# Altium PCB 智能车主板.PcbDoc
Units mil, origin at the board's own origin, x right, y up, seen from the top; angles counter-clockwise.
Board outline 3115 x 1870 mil, 4 copper layers (Top, GND02, PWR03, BOTTOM), stack 23.756 mil thick; 92 components, 73 nets, 361 pads, 0 vias.
Unrouted connection lines stored in the file: 221.
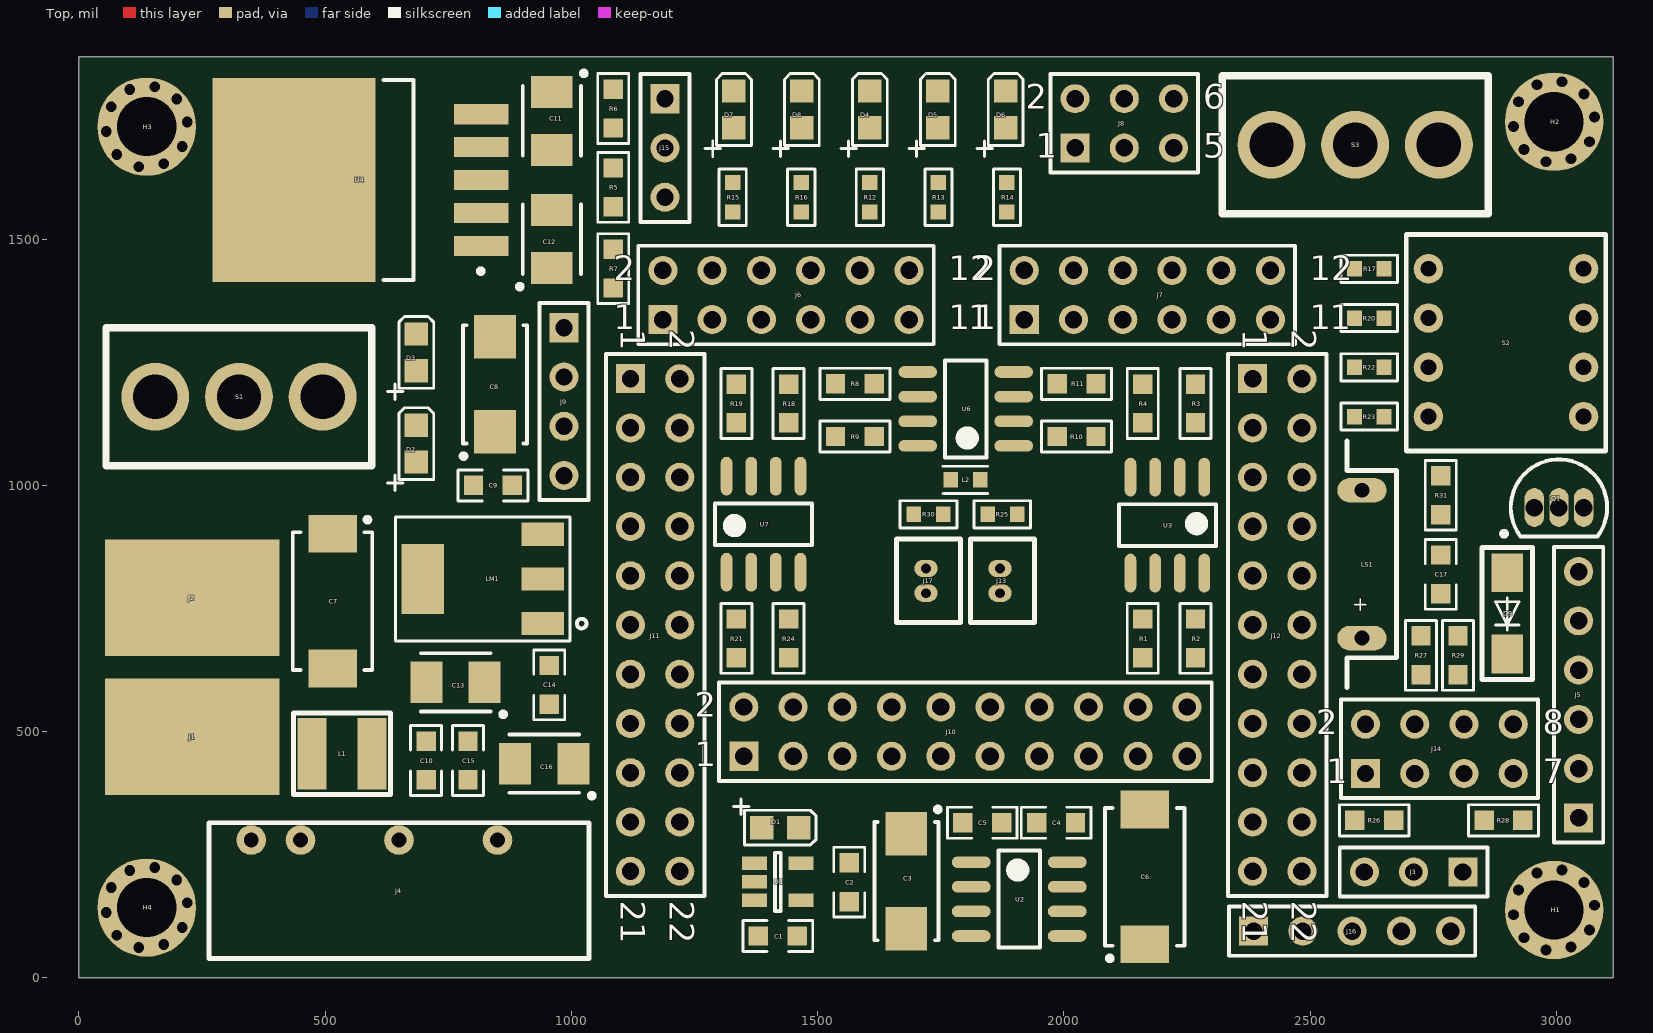
[diagram p0: Top view]
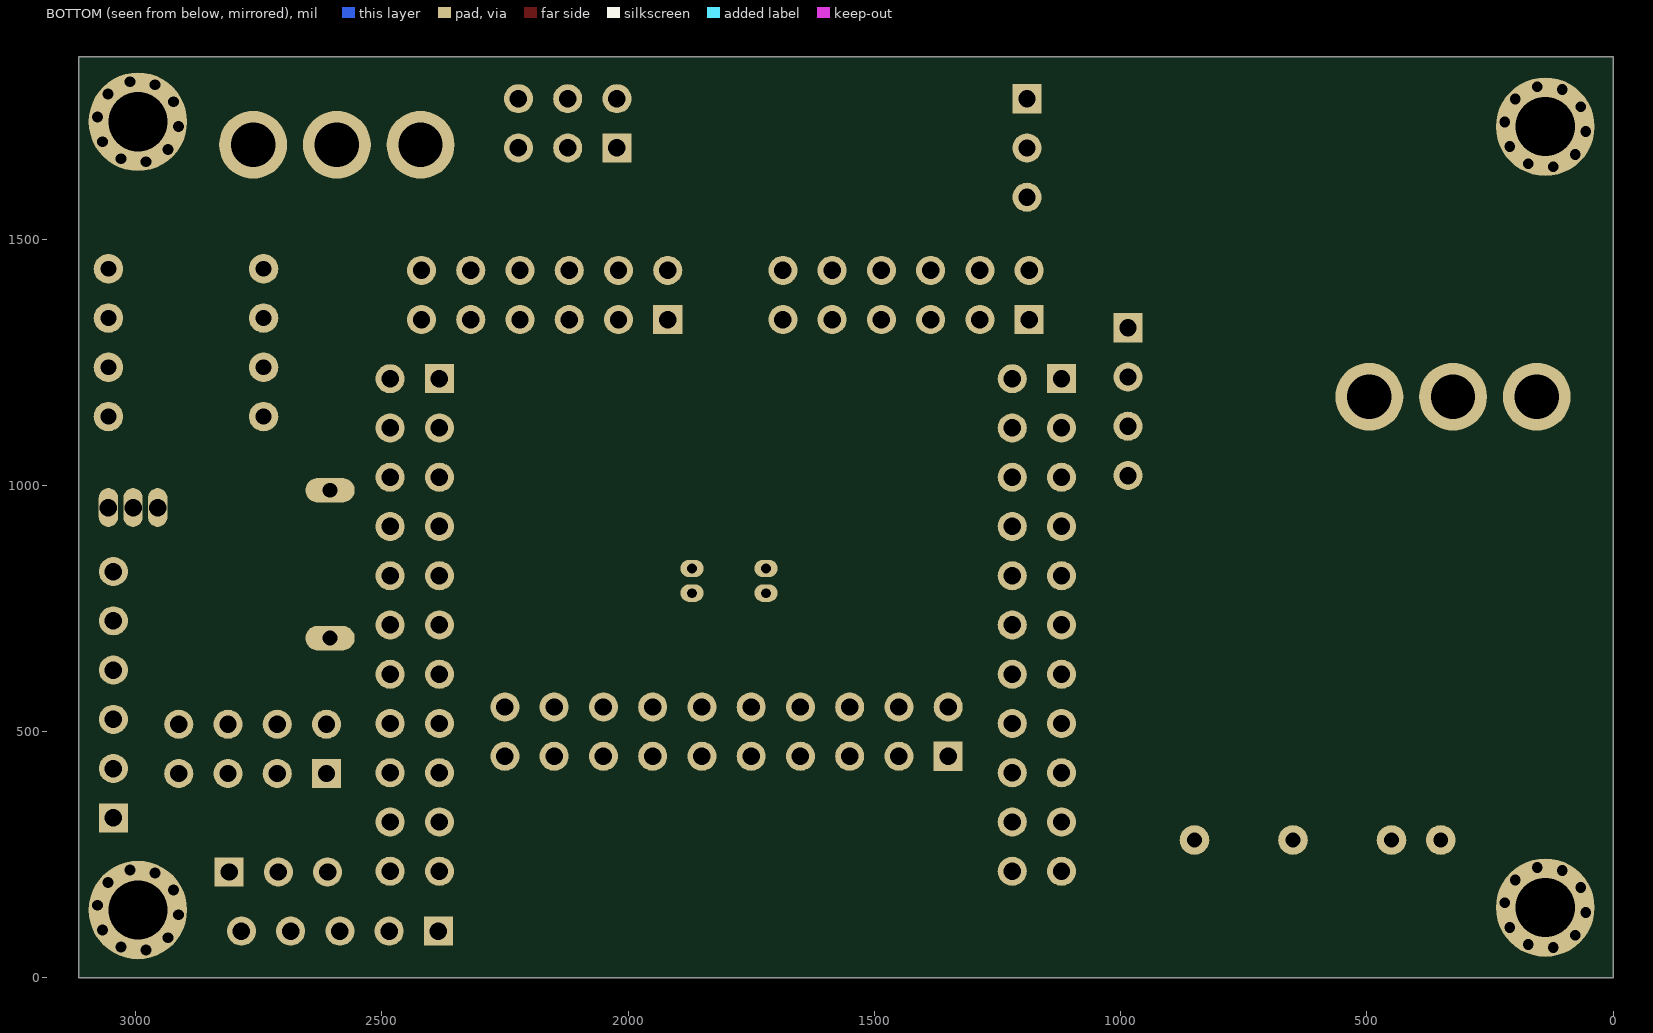
[diagram p1: BOTTOM view, seen from below]
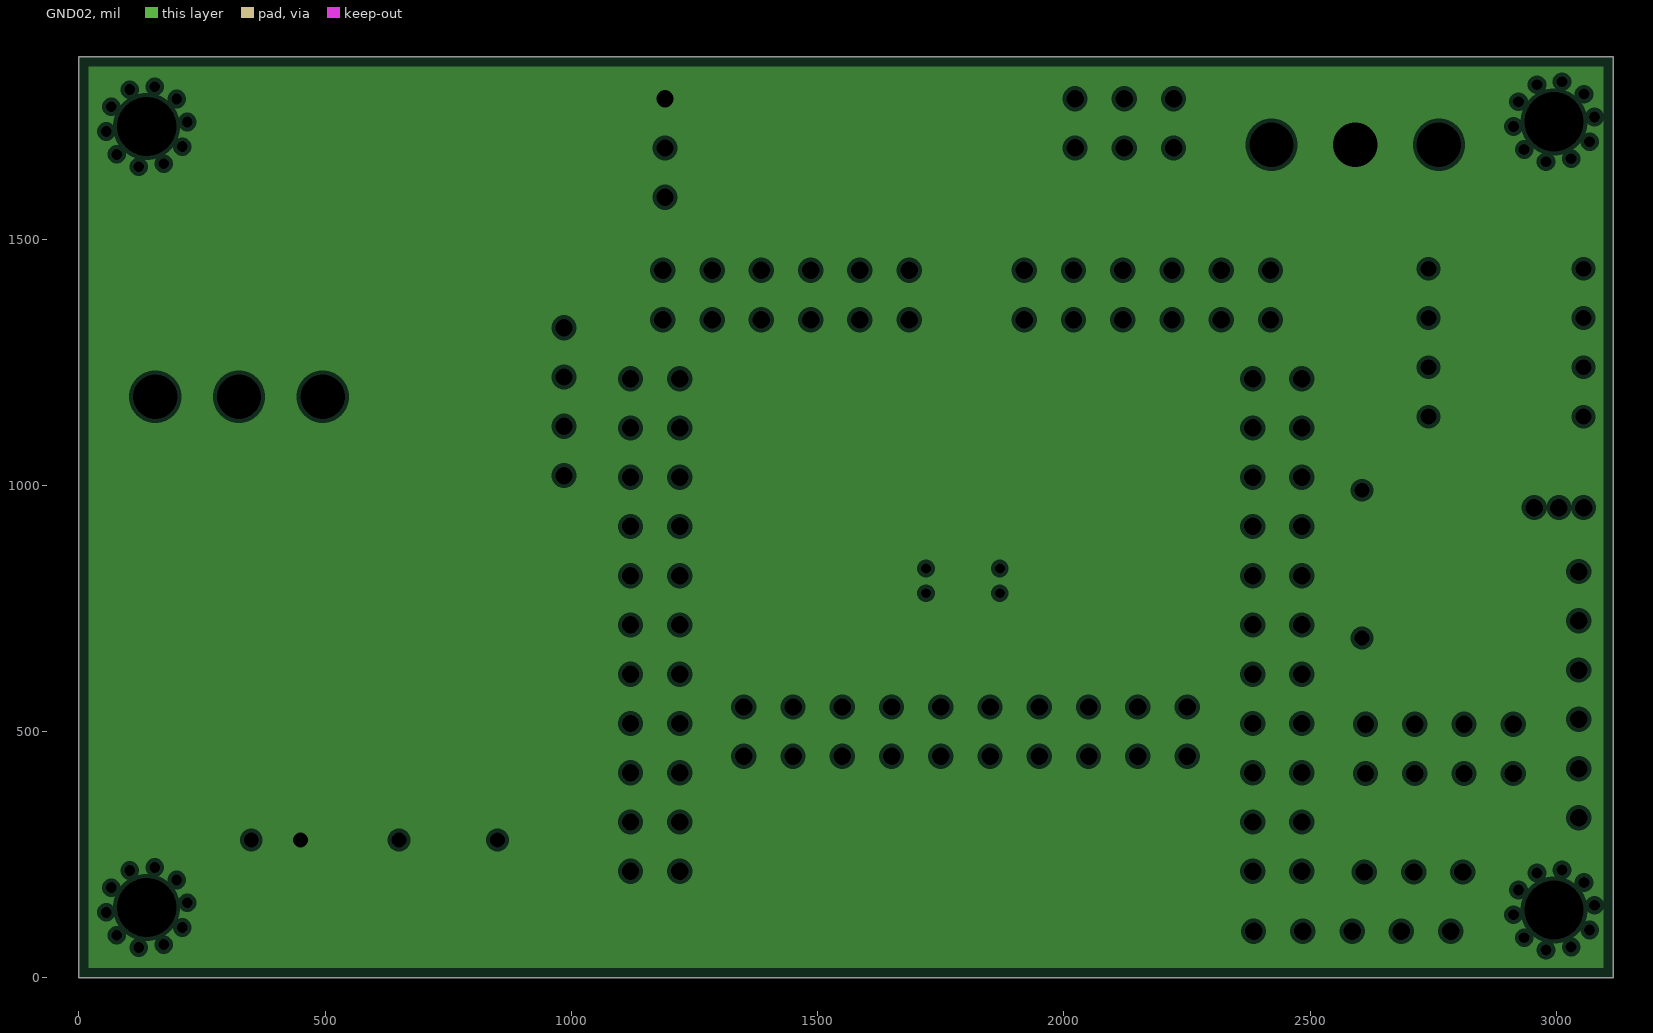
[diagram p2: GND02, clearances drawn from the general rule]
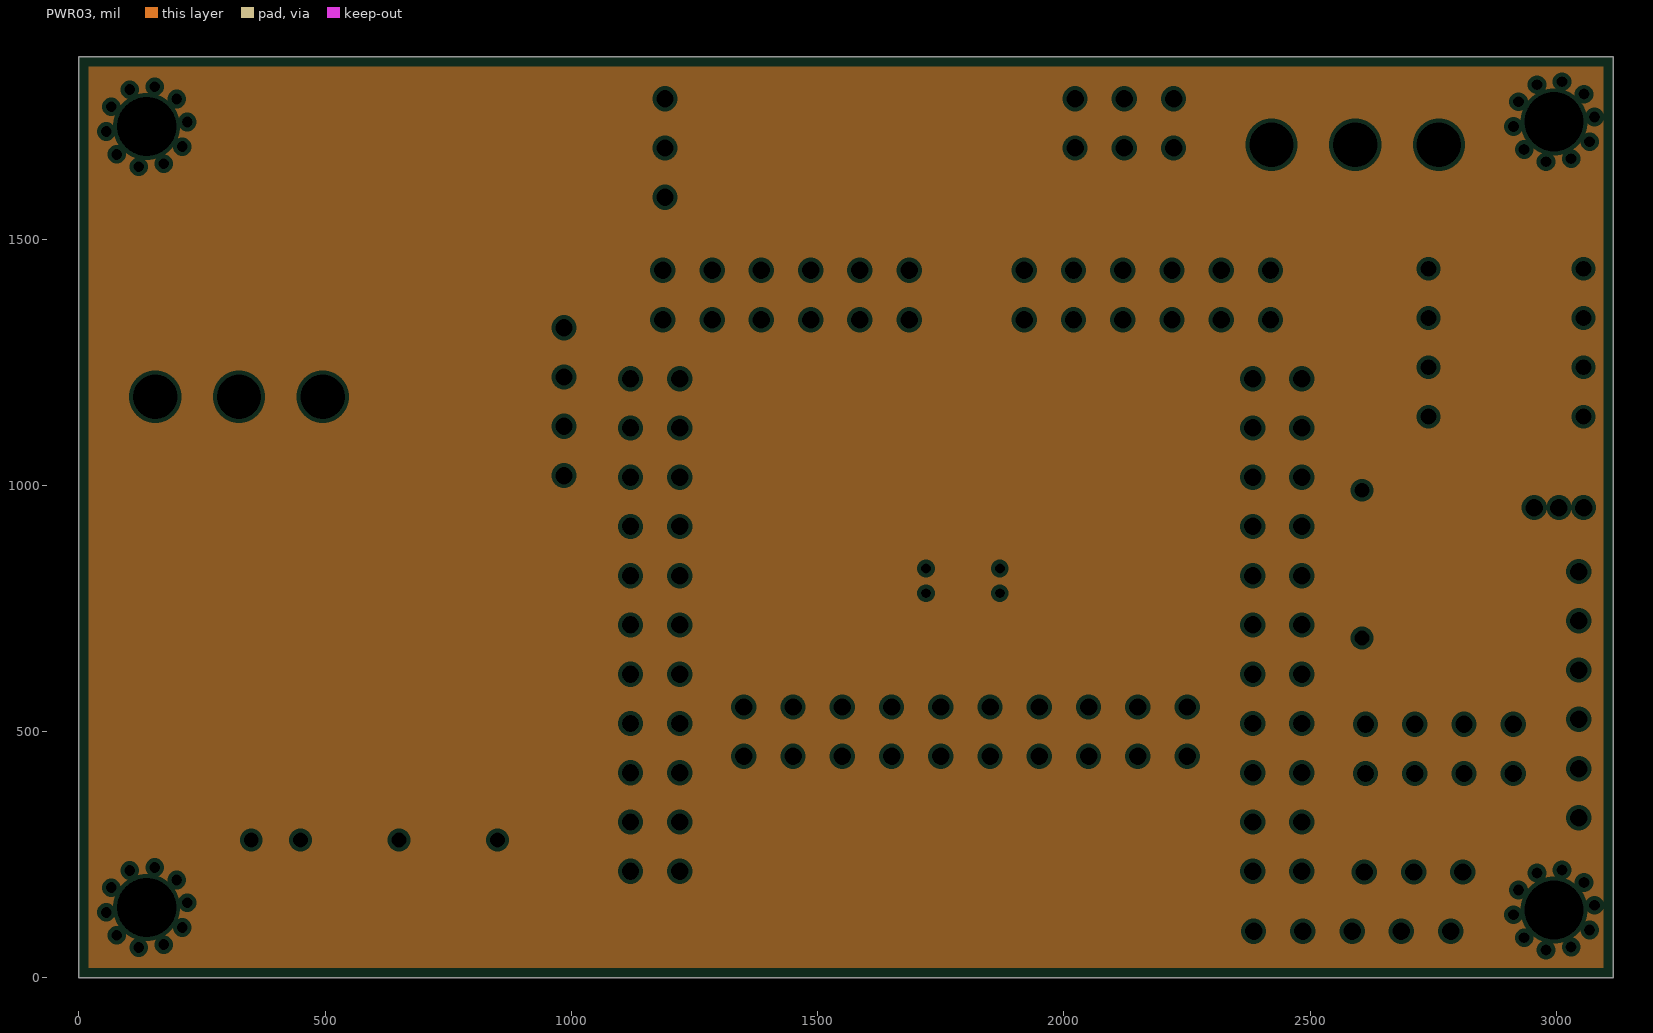
[diagram p3: PWR03, clearances drawn from the general rule]

## Layer stack, top to bottom
Top Solder: solder mask 0.4, Solder Resist, Dk 3.5
Top: signal copper 1.4
Dielectric 1: prepreg 2.8, PP-006, Dk 4.1
GND02: plane copper 1.3779, net (Multiple Nets)
Dielectric1: dielectric 12.6, FR-4, Dk 4.8
PWR03: plane copper 1.3779, net (Multiple Nets)
Dielectric 2: prepreg 2.8, PP-006, Dk 4.1
BOTTOM: signal copper 1.4
Bottom Solder: solder mask 0.4, Solder Resist, Dk 3.5

## Board outline
0,0 3115,0 3115,1870 0,1870

## Design rules (kind name [scope] priority, off if disabled: settings)
Clearance [All] p1: gap=6 ignorepadtopadclearanceinfootprint=FALSE except(8: Arc-Arc Arc-Track Track-Track; 10: Arc-Fill Arc-Poly Arc-Region Track-Fill Track-Poly Track-Region SMDPad-Fill SMDPad-Poly SMDPad-Region THPad-Fill THPad-Poly THPad-Region Fill-Fill Fill-Poly Fill-Region Poly-Poly Poly-Region Region-Region)
PlaneClearance [All] p1: clearance=8
PlaneConnect [All] p1: planeconnectstyle=Direct reliefexpansion=20 reliefentries=4 reliefconductorwidth=10 reliefairgap=10
PolygonConnect [All] p1: connectstyle=Direct reliefconductorwidth=10 reliefentries=4 polygonreliefangle="90 Angle" airgapwidth=10
RoutingVias [All] p1: holewidth=12 width=22 viastyle="Through Hole" minholewidth=12 minwidth=22 maxholewidth=12 maxwidth=22
SilkToSilkClearance [All] p1: silktosilkclearance=2
SilkToSolderMaskClearance [IsPad] p1: minsilkscreentomaskgap=2 clearancetoexposedcopper=TRUE
SolderMaskExpansion [All] p1: expansion=4 istentingtop=FALSE
Width PWR [InNetClass('PWR')] p1: maxlimit=60 minlimit=15 preferedwidth=15
Width [All] p2: maxlimit=6 minlimit=6 preferedwidth=6
26 further rules are at their usual default settings.

## Components (designator, comment, footprint, x,y, rotation, side; value= is the part's Value field where it differs from the comment)
C1 "4.7uF" 0805C 1419.09,85 r0 top
C2 "4.7uF" 0805C 1564.09,194.37 r90 top
C3 "47uF" C型钽电容_6032_28 1680,196.46 r270 top
C4 "10uF" 0805C 1984.09,315 r0 top
C5 "0.1uF" 0805C 1834.09,315 r0 top
C6 "100uF" D型钽电容_7343_31 2164.09,205 r90 top
C7 "47uF" D型钽电容_7343_31 515,765 r270 top
C8 "22uf" C型钽电容_6032_28 845,1205 r90 top
C9 "0.1uF" 0805C 840.63,1000 r0 top
C10 "4.7uF" 0805C 705,441.39 r90 top
C11 "22uF" B型钽电容_3528_21 960.32,1740 r270 top
C12 "22uF" B型钽电容_3528_21 960.32,1500 r90 top
C13 "22uf" B型钽电容_3528_21 765,600 r180 top
C14 "0.1uF" 0805C 955,595 r90 top
C15 "0.1uF" 0805C 790,441.39 r90 top
C16 "22uF" B型钽电容_3528_21 945,435 r180 top
C17 "104" 0805C 2765,819.37 r90 top
D1 "1N5819" 0805D 1424.09,305 r0 top
D2 "SS34" 0805D 685,1084.68 r90 top
D3 "1N5819" 0805D 685,1270 r90 top
D4 "LED" 0805D 1605.83,1763.23 r90 top
D5 "LED" 0805D 1743.82,1763.23 r90 top
D6 "LED" 0805D 1881.81,1763.23 r90 top
D7 "LED" 0805D 1329.84,1763.23 r90 top
D8 "LED" 0805D 1467.83,1763.23 r90 top
D9 "SS34" SS34_3D 2900,740.08 r270 top
H1 "固定孔" 铜柱孔3 2995.12,137.8 r0 top
H2 "固定孔" 铜柱孔3 2995.12,1738.23 r0 top
H3 "固定孔" 铜柱孔3 137.8,1728.23 r0 top
H4 "固定孔" 铜柱孔3 137.8,142.8 r0 top
J1 "-" 单面焊盘2*3MM_1PIN 230,489.68 r90 top
J2 "-" 单面焊盘2*3MM_1PIN 230,771.85 r270 top
J3 "AD-KEY" HDR1X3 2810,215 r180 top
J4 "CON4" B0505S-2W 600,280 r0 top
J5 "OLED" HDR1X6 3045,325 r90 top
J6 "CON12" HDR2X6 1185.63,1336.57 r0 top
J7 "CON12" HDR2X6 1919.37,1336.57 r0 top
J8 "motor drive" HDR2X3 2022.52,1685.08 r0 top
J9 "bluetooth" HDR1X4 985,1320 r270 top
J10 "HEADER 10X2" HDR2X10 1350,450 r0 top
J11 "HEADER 11X2" HDR2X11 1120,1216.57 r270 top
J12 "HEADER 11X2" HDR2X11 2382.99,1216.57 r270 top
J13 "CON2" 2PIN杜邦插座_1.27MM 1870,781.26 r90 top
J14 "BM" HDR2X4 2612.24,415 r0 top
J15 "servo drive" HDR1X3 1190,1785 r270 top
J16 "CCD" HDR1X5 2385,95 r0 top
J17 "CON2" 2PIN杜邦插座_1.27MM 1720,781.26 r90 top
L1 "6.8uH" CDRH3D16_4.2*1.8 533.98,455.25 r90 top
L2 "100M" 0603L 1800,1011.26 r0 top
LM1 "lm2940" SOT-223 820,810 r90 top
LS1 "Bell" 蜂鸣器侧装 2605,890 r90 top
Q1 "2N3904" TO-92A 3005,955 r270 top
R1 "1K" 0805R 2160,689.37 r270 top
R2 "1K" 0805R 2267,689.37 r270 top
R3 "1K" 0805R 2267,1166.26 r90 top
R4 "1K" 0805R 2160,1166.26 r90 top
R5 "3.9k" 0805R 1085,1605 r90 top
R6 "1k" 0805R 1085,1765 r90 top
R7 "1k" 0805R 1085,1440 r90 top
R8 "1K" 0805R 1575.63,1206.26 r180 top
R9 "1K" 0805R 1575.63,1099.26 r180 top
R10 "1K" 0805R 2025.63,1099.26 r180 top
R11 "1K" 0805R 2025.63,1206.26 r0 top
R12 "1k" 0603R 1605.85,1585 r270 top
R13 "2.2k" 0603R 1745.09,1585 r270 top
R14 "3.3k" 0603R 1884.33,1585 r270 top
R15 "3.3K" 0603R 1327.36,1585 r270 top
R16 "3.3K" 0603R 1466.6,1585 r90 top
R17 "1k" 0603R 2620,1439.68 r180 top
R18 "1K" 0805R 1441,1166.26 r90 top
R19 "1K" 0805R 1335,1166.26 r90 top
R20 "1k" 0603R 2620,1339.68 r180 top
R21 "1K" 0805R 1335,689.37 r270 top
R22 "1k" 0603R 2620,1239.68 r180 top
R23 "1k" 0603R 2620,1139.68 r180 top
R24 "1K" 0805R 1441,689.37 r90 top
R25 "1k" 0603R 1875,941.26 r180 top
R26 "1k" 0805R 2630,320 r180 top
R27 "1k" 0805R 2725,655 r90 top
R28 "1k" 0805R 2892.36,320 r180 top
R29 "1k" 0805R 2800,655 r90 top
R30 "1k" 0603R 1725,941.26 r180 top
R31 "1K" 0805R 2765,980 r90 top
S1 "SW-SPST" 开关 480,925 r270 top
S2 "SW DIP-4" 4路拨码开关 2755,1384.68 r0 top
S3 "SW-SPST" 开关 2746.24,1436.52 r270 top
U1 "TPS73633" SOT23_5-LEADS 1419.09,195 r0 top
U2 "LM2663" SOP_8(OPA) 1909.09,160 r0 top
U3 "HCPL0631" SOP_8(OPA) 2210,919.37 r270 top
U4 "MIC29302" TO_263_5(10.5*8.4MM) 594.61,1623.94 r0 top
U6 "HCPL0631" SOP_8(OPA) 1800.63,1155.26 r180 top
U7 "HCPL0631" SOP_8(OPA) 1390,921.26 r90 top

## Footprints (in the part's own frame and the unit in brackets; to place one, negate y for a bottom-side part, rotate by r counter-clockwise, add the part's x,y. Pads: shape width x height; smd on the part's side, far side on the other; paste and mask are expansions set on the pad)
2PIN杜邦插座_1.27MM [mm]
  oval 0.9x1.2 hole 0.5: 1(0,0) 2(1.27,0)
  silkscreen extent -1.52,-1.78 2.79,1.52
4路拨码开关 [mil]
  round 60 hole 32.01: 1(-15,55) 2(-15,-45) 3(-15,-145) 4(-15,-245) 5(299.96,-245) 6(299.96,-145) 7(299.96,-45) 8(299.96,55)
  silkscreen extent -60,-315 345,125
0603L [mm]
  rect 0.76x0.8 smd: 1(-0.76,0) 2(0.76,0)
  silkscreen extent -1.15,-0.7 1.15,0.7
0603R [mm]
  rect 0.76x0.8 smd: 1(-0.76,0) 2(0.76,0)
  silkscreen extent -1.46,-0.7 1.46,0.7
0805C [mm]
  rect 1x1 smd: 1(-1,0) 2(1,0)
  silkscreen extent -1.8,-0.8 1.8,0.8
0805D [mm]
  rect 1.2x1.2 smd: 1(-0.95,0) 2(0.95,0)
  silkscreen extent -2.42,-0.9 1.85,1.49
0805R [mm]
  rect 1x1 smd: 1(-1,0) 2(1,0)
  silkscreen extent -1.8,-0.8 1.8,0.8
B0505S-2W [mil]
  round 60 hole 30: 1(-250,0) 2(-150,0) 3(50,0) 4(250,0)
  silkscreen extent -336,-241 436,35
B型钽电容_3528_21 [mm] "Molded Capacitor, 2-Leads, Body 3.5x2.8mm, IPC Medium Density"
  rect 1.65x2.15 smd: 1(-1.5,0) 2(1.5,0)
  silkscreen extent -2.57,-1.5 1.8,1.78, body extent -1.8,-1.45 1.8,1.45, height 1.9
CDRH3D16_4.2*1.8 [mm]
  rect 3.7x1.5 smd: 1(0,-1.55) 2(0,1.55)
  silkscreen extent -2.1,-2.5 2.1,2.5
C型钽电容_6032_28 [mm] "Molded Capacitor, 2-Leads, Body 6.0x3.2mm, IPC Medium Density"
  rect 2.25x2.15 smd: 1(-2.45,0) 2(2.45,0)
  silkscreen extent -3.82,-1.65 3.05,1.75, body extent -3,-1.6 3,1.6, height 2.5
D型钽电容_7343_31 [mm] "Molded Capacitor, 2-Leads, Body 7.3x4.3mm, IPC Medium Density"
  rect 1.95x2.5 smd: 1(-3.475,0) 2(3.475,0)
  silkscreen extent -4.32,-2.05 3.55,2.05, body extent -3.65,-2.15 3.65,2.15, height 2.8
HDR1X3 [mm] "Connector; Header; 3 Position"
  rect 1.5x1.5 hole 0.9: 1(0,0)
  round 1.5 hole 0.9: 2(2.54,0) 3(5.08,0)
  silkscreen extent -1.27,-1.27 6.35,1.27
HDR1X4 [mm] "Connector; Header; 4 Position"
  rect 1.5x1.5 hole 0.9: 1(0,0)
  round 1.5 hole 0.9: 2(2.54,0) 3(5.08,0) 4(7.62,0)
  silkscreen extent -1.27,-1.27 8.89,1.27
HDR1X5 [mm] "Connector; Header; 5 Position"
  rect 1.5x1.5 hole 0.9: 1(0,0)
  round 1.5 hole 0.9: 2(2.54,0) 3(5.08,0) 4(7.62,0) 5(10.16,0)
  silkscreen extent -1.27,-1.27 11.43,1.27
HDR1X6 [mm] "Connector; Header; 6 Position"
  rect 1.5x1.5 hole 0.9: 1(0,0)
  round 1.5 hole 0.9: 2(2.54,0) 3(5.08,0) 4(7.62,0) 5(10.16,0) 6(12.7,0)
  silkscreen extent -1.27,-1.27 13.97,1.27
HDR2X3 [mm] "Connector; Header; 3x2 Position"
  rect 1.5x1.5 hole 0.9: 1(0,0)
  round 1.5 hole 0.9: 2(0,2.54) 3(2.54,0) 4(2.54,2.54) 5(5.08,0) 6(5.08,2.54)
  silkscreen extent -1.27,-1.27 6.35,3.81
HDR2X4 [mm] "Connector; Header; 4x2 Position"
  rect 1.5x1.5 hole 0.9: 1(0,0)
  round 1.5 hole 0.9: 2(0,2.54) 3(2.54,0) 4(2.54,2.54) 5(5.08,0) 6(5.08,2.54) 7(7.62,0) 8(7.62,2.54)
  silkscreen extent -1.27,-1.27 8.89,3.81
HDR2X6 [mm] "Connector; Header; 6x2 Position"
  rect 1.5x1.5 hole 0.9: 1(0,0)
  round 1.5 hole 0.9: 2(0,2.54) 3(2.54,0) 4(2.54,2.54) 5(5.08,0) 6(5.08,2.54) 7(7.62,0) 8(7.62,2.54) 9(10.16,0) 10(10.16,2.54) 11(12.7,0) 12(12.7,2.54)
  silkscreen extent -1.27,-1.27 13.97,3.81
HDR2X10 [mm] "Connector; Header; 10x2 Position"
  rect 1.5x1.5 hole 0.9: 1(0,0)
  round 1.5 hole 0.9: 2(0,2.54) 3(2.54,0) 4(2.54,2.54) 5(5.08,0) 6(5.08,2.54) 7(7.62,0) 8(7.62,2.54) 9(10.16,0) 10(10.16,2.54) 11(12.7,0) 12(12.7,2.54) 13(15.24,0) 14(15.24,2.54) 15(17.78,0) 16(17.78,2.54) 17(20.32,0) 18(20.32,2.54) 19(22.86,0) 20(22.86,2.54)
  silkscreen extent -1.27,-1.27 24.13,3.81
HDR2X11 [mm] "Connector; Header; 11x2 Position"
  rect 1.5x1.5 hole 0.9: 1(0,0)
  round 1.5 hole 0.9: 2(0,2.54) 3(2.54,0) 4(2.54,2.54) 5(5.08,0) 6(5.08,2.54) 7(7.62,0) 8(7.62,2.54) 9(10.16,0) 10(10.16,2.54) 11(12.7,0) 12(12.7,2.54) 13(15.24,0) 14(15.24,2.54) 15(17.78,0) 16(17.78,2.54) 17(20.32,0) 18(20.32,2.54) 19(22.86,0) 20(22.86,2.54) 21(25.4,0) 22(25.4,2.54)
  silkscreen extent -1.27,-1.27 26.67,3.81
SOP_8(OPA) [mm] "SOIC, 8-Leads, Body 5.0x4.0mm (max), Pitch 1.27mm, IPC Medium Density"
  oval 2x0.6 smd: 1(-2.475,1.905) 2(-2.475,0.635) 3(-2.475,-0.635) 4(-2.475,-1.905) 5(2.475,-1.905) 6(2.475,-0.635) 7(2.475,0.635) 8(2.475,1.905)
  silkscreen extent -1.07,-2.5 1.08,2.5, body extent -2,-2.5 2,2.5, height 1.75
SOT23_5-LEADS [mm] "SOT23, 5-Leads, Body 3.0x3.0mm (max), Pitch 0.95mm, IPC Low Density"
  rect 1.3x0.7 smd: 1(-1.2,0.95) 2(-1.2,0) 3(-1.2,-0.95) 4(1.2,-0.95) 5(1.2,0.95)
  silkscreen extent -0.15,-1.5 0.15,1.5, body extent -0.85,-1.52 0.85,1.53, height 1.45
SOT-223 [mm]
  rect 1.2x2.2 smd: 1(-2.3,-3.1) 2(0,-3.1) 3(2.3,-3.1)
  rect 3.6x2.2 smd: 4(0,3.1)
  silkscreen extent -3.2,-5.35 3.2,4.5
SS34_3D [mm]
  rect 2x1.6 smd: 1(-2.1,0) 2(2.1,0)
  silkscreen extent -3.4,-1.3 3.4,1.3, body extent -2.46,-1.36 2.54,1.34, height 2.15
TO-92A [mm] "TO, Flat Index; 3 In-Line, Axial Leads; Body Dia. 4.5mm; Leads 0.51 x 0.48 mm (max)"
  oval 2x1 hole 0.9: 1(0,-1.27) 2(0,0) 3(0,1.27)
  silkscreen extent -2.48,-2.95 1.5,2.48, body extent -2.48,-2.5 1.5,2.5, height 0.25
TO_263_5(10.5*8.4MM) [mm] "D2-PAK, 6-Pads, Body 8.8x10.3mm (max), IPC Medium Density"
  rect 2.8x1.05 smd: 1(5.65,-3.5) 2(5.65,-1.8) 3(5.65,-0.1) 4(5.65,1.6) 5(5.65,3.3)
  rect 8.4x10.5 smd: 3(-4,-0.1)
  silkscreen extent 0.6,-5.25 5.75,5.05, body extent -8.63,-5.1 7.03,4.9
单面焊盘2*3MM_1PIN [mm]
  rect 6x9 smd: 1(0,0)
开关 [mil]
  round 137.8 hole 90: 1(-255,15) 2(-255,-155) 3(-255,-325)
  silkscreen extent -395,-425 -115,115
蜂鸣器侧装 [mil]
  oval 50x100 hole 30: 1(-200,0) 2(100,0)
  silkscreen extent -300,-70 200,30
铜柱孔3 [mil]
  round 23 hole 22: 11(-82.21,-9.67) 11(-72.19,40.5) 11(-60.83,-56.14) 11(-34.6,75.2) 11(-16.21,-81.17) 11(16.21,81.17) 11(34.6,-75.2) 11(60.83,56.14) 11(72.19,-40.5) 11(82.21,9.67)
  round 200 hole 120: 11(0,0)

## Part data
C1 C2 C4 C5 C9 C10 C14 C15 C17: library part CAP, "电容"
C3 C6 C7 C8 C11 C12 C13 C16: library part 极性电容, "极性电容"
D1 D3: library part SS34, "二极管"
D2 D9: "二极管"
J1 J2: library part CON1, "Connector"
J3 J15: library part CON3, "SOCKET"
J4 J6 J7 J13 J17: "Connector"
J5 J8: library part CON6, "Connector"
J9: library part CON4, "Connector"
J10 J11 J12: "排针"
J14: library part CON8, "Connector"
J16: library part CON5, "Connector"
L1: library part INDUCTOR, "电感"
L2: library part INDUCTOR_2
LM1 U1 U2 U4: "IC"
LS1: "Electrical Bell", LatestRevisionDate=17-Jul-2002, LatestRevisionNote="Re-released for DXP Platform.", PackageReference=PIN2, Published=24-Mar-1999, Publisher="Altium Limited"
Q1: "NPN General Purpose Amplifier", PackageDocument=Sep-1998, Code_JEDEC=TO-92A, ComponentLink1Description="Manufacturer Link", ComponentLink1URL=http://www.fairchildsemi.com/, ComponentLink2Description=Datasheet, ComponentLink2URL=http://www.fairchildsemi.com/ds/2N%2F2N3904.pdf, DatasheetDocument=1997, LatestRevisionDate=15-Jan-2003, LatestRevisionNote="PCB Footprint 'BCY-W3/D4.7' replaced", PackageReference=TO-92A, Published=8-Jun-2000, Publisher="Altium Limited"
R1 R2 R3 R4 R5 R6 R7 R8 R9 R10 R11 R12 R13 R14 R15 R16 R17 R18 R19 R20 R21 R22 R23 R24 R25 R26 R27 R28 R29 R30 R31: library part RES, "电阻"
S1 S3: "Single-Pole, Single-Throw Switch", LatestRevisionDate=17-Jul-2002, LatestRevisionNote="Re-released for DXP Platform.", PackageDescription="Switch; 2 Leads", PackageReference=SPST-2, Published=24-Mar-1999, Publisher="Altium Limited"
S2: "DIP Switch"
U3 U6 U7: "光耦"

## Nets (pads, with @x,y where several pads share a name; then routed paths per layer and width w, separated by ;. In a path a pad name is that pad's centre, name@x,y a point inside that pad or via, vN(x,y) a via of type N, cw(c..) or ccw(c..) an arc to the next point about the centre after c; other vN are vias at no path point)
A1: J11.7
ADB2: J6.9 J6.10 J10.5
ADE20: J6.1 J6.2 J11.3
ADE21: J6.3 J6.4 J11.4
ADE22: J6.5 J6.6 J11.1
ADE23: J6.7 J6.8 J11.2
ADE29: J11.6
ADE30: J6.11 J6.12 J11.5
AGND: J7.5 J7.6 J7.7 J7.8 J11.12 L2.1
B16: J10.11 J14.4 R29.1
B17: J10.12 J14.2 R27.1
C0: J3.2 J10.15
C1: J10.16
C2: J10.18
C3: J10.20 R31.1
C4: J12.22 J14.3 R28.1
C5: J12.21 J14.1 R26.1
C6: J5.1 J12.20
C7: J5.2 J12.19
C8: J5.3 J12.18
C9: J5.4 J12.17
CCDB0: J10.2 J16.1
CCDB1: J10.4 J16.2
CCDB3: J10.6 J16.3
D4: J12.6 R23.1 S2.4
D5: J12.5 R22.1 S2.3
D6: J12.4 R20.1 S2.2
D7: J12.3 R17.1 S2.1
GGND: C7.2 C8.2 C9.2 C10.1 C13.2 C14.1 D7.2 D8.2 J1.1 J4.2 J15.1 LM1.2 S3.2 U3.5 U6.5 U7.5
GHGL: J10.13 J17.1 R30.1
GHGR: J10.14 J13.1 R25.1
GND: C1.1 C2.1 C4.1 C5.1 C6.1 C11.2 C12.2 C15.1 C16.2 C17.1 D4.2 D5.2 D6.2 H1.11 H2.11 H3.11 H4.11 J3.3 J4.3 J5.6 J9.4 J10.1 J10.3 J10.17 J10.19 J11.21 J11.22 J12.2 J13.2 J14.5 J14.6 J16.5 J17.2 L2.2 Q1.1 R6.1 R7.1 S2.5 S2.6 S2.7 S2.8 U1.2 U2.1 U2.3 U2.6 U4.3
LPWM1: J8.1 R9.1 U6.7
LPWM2: J8.3 R8.1 U6.6
"motor L+": J12.10 R10.1
"motor L-": J12.9 R11.1
"motor R+": J12.8 R3.1
"motor R-": J12.7 R4.1
NetC1_2: C1.2 D1.2 U1.1 U1.3
NetC3_1: C3.1 U2.2
NetC3_2: C3.2 U2.4
NetC8_1: C8.1 C9.1 D2.2 LM1.1
NetC12_1: C12.1 D3.2 U4.1 U4.2
NetD4_1: D4.1 R12.1
NetD5_1: D5.1 R13.1
NetD6_1: D6.1 R14.1
NetD7_1: D7.1 R15.1
NetD8_1: D8.1 R16.1
NetD9_1: D9.1 LS1.2 Q1.3
NetJ4_1: J4.1 L1.2
NetJ8_5: J8.5 J8.6 S3.1
NetQ1_2: Q1.2 R31.2
NetR3_2: R3.2 U3.2
NetR4_2: R4.2 U3.3
NetR5_1: R5.1 R7.2 U4.5
NetR10_2: R10.2 U6.2
NetR11_2: R11.2 U6.3
NetR18_1: R18.1 U7.6
NetR21_2: R21.2 U7.2
NetR24_2: R24.2 U7.3
PWM5: J11.16 R21.1
RPWM1: J8.2 R2.1 U3.7
RPWM2: J8.4 R1.1 U3.6
RX: J9.3 J11.11
SERVODUTY: J15.3 R19.1 U7.7
TX: J9.2 J11.9
V5: C10.2 C13.1 C14.2 L1.1 LM1.3 R1.2 R2.2 R8.2 R9.2 R16.2 R18.2 R19.2 U3.8 U6.8 U7.8
V6: C11.1 J15.2 R5.2 R6.2 R15.2 U4.4
VBAT: C7.1 D2.1 D3.1 S1.1
VBAT+: J2.1 S1.2
VCC3.3: C2.2 J3.1 J5.5 J9.1 J12.1 J16.4 R12.2 R17.2 R20.2 R22.2 R23.2 R25.2 R30.2 U1.5
VCC5: C4.2 C15.2 C16.1 C17.2 D1.1 D9.2 J4.4 J7.1 J7.2 J7.3 J7.4 J14.7 J14.8 LS1.1 R13.2 R26.2 R27.2 R28.2 R29.2 U2.8 U3.1 U3.4 U6.1 U6.4 U7.1 U7.4
VCC-5: C5.2 C6.2 J7.9 J7.10 J7.11 J7.12 R14.2 U2.5
pads on no net: J10.7 J10.8 J10.9 J10.10 J11.8 J11.10 J11.13 J11.14 J11.15 J11.17 J11.18 J11.19 J11.20 J12.11 J12.12 J12.13 J12.14 J12.15 J12.16 LM1.4 R24.1 S1.3 S3.3 U1.4 U2.7

## Polygon pours and split planes (outlines as drawn)
GGND on GND02 (split plane): 3094.9,20.1 20.1,20.1 20.1,1849.9 3094.9,1849.9
no net on PWR03 (split plane): 3094.9,20.1 20.1,20.1 20.1,1849.9 3094.9,1849.9

## Text inside footprints (layer, text, board x,y; h text height)
J6: Top Overlay "2" at 1085.63,1416.57 h50; Top Overlay "1" at 1085.63,1316.57 h50; Top Overlay "1" at 1765.63,1316.57 h50; Top Overlay "1" at 1805.63,1316.57 h50; Top Overlay "12" at 1765.63,1416.57 h50
J7: Top Overlay "1" at 2539.37,1316.57 h50; Top Overlay "2" at 1819.37,1416.57 h50; Top Overlay "1" at 1819.37,1316.57 h50; Top Overlay "1" at 2499.37,1316.57 h50; Top Overlay "12" at 2499.37,1416.57 h50
J8: Top Overlay "1" at 1942.52,1665.08 h50; Top Overlay "2" at 1922.52,1765.08 h50; Top Overlay "5" at 2282.52,1665.08 h50; Top Overlay "6" at 2282.52,1765.08 h50
J10: Top Overlay "1" at 1250,430 h50; Top Overlay "2" at 1250,530 h50
J11: Top Overlay "1" at 1100,1316.57 h50 r270; Top Overlay "2" at 1200,1316.57 h50 r270; Top Overlay "21" at 1100,156.57 h50 r270; Top Overlay "22" at 1200,156.57 h50 r270
J12: Top Overlay "22" at 2462.99,156.57 h50 r270; Top Overlay "1" at 2362.99,1316.57 h50 r270; Top Overlay "2" at 2462.99,1316.57 h50 r270; Top Overlay "21" at 2362.99,156.57 h50 r270
J14: Top Overlay "8" at 2972.24,495 h50; Top Overlay "7" at 2972.24,395 h50; Top Overlay "1" at 2532.24,395 h50; Top Overlay "2" at 2512.24,495 h50
LS1: Top Overlay "+" at 2615,740 h30 r90